# Altium PCB Buck-Boost-Converter_PCB.PcbDoc (part 2 of 2)
Units mm, origin at the board's own origin, x right, y up, seen from the top; angles counter-clockwise.
Board outline 189.74 x 81.03 mm, 4 copper layers (Top Layer, GND Layer, Pwr Layer, Bottom Layer), stack 2.398 mm thick; 93 components, 21 nets, 175 pads, 81 vias.
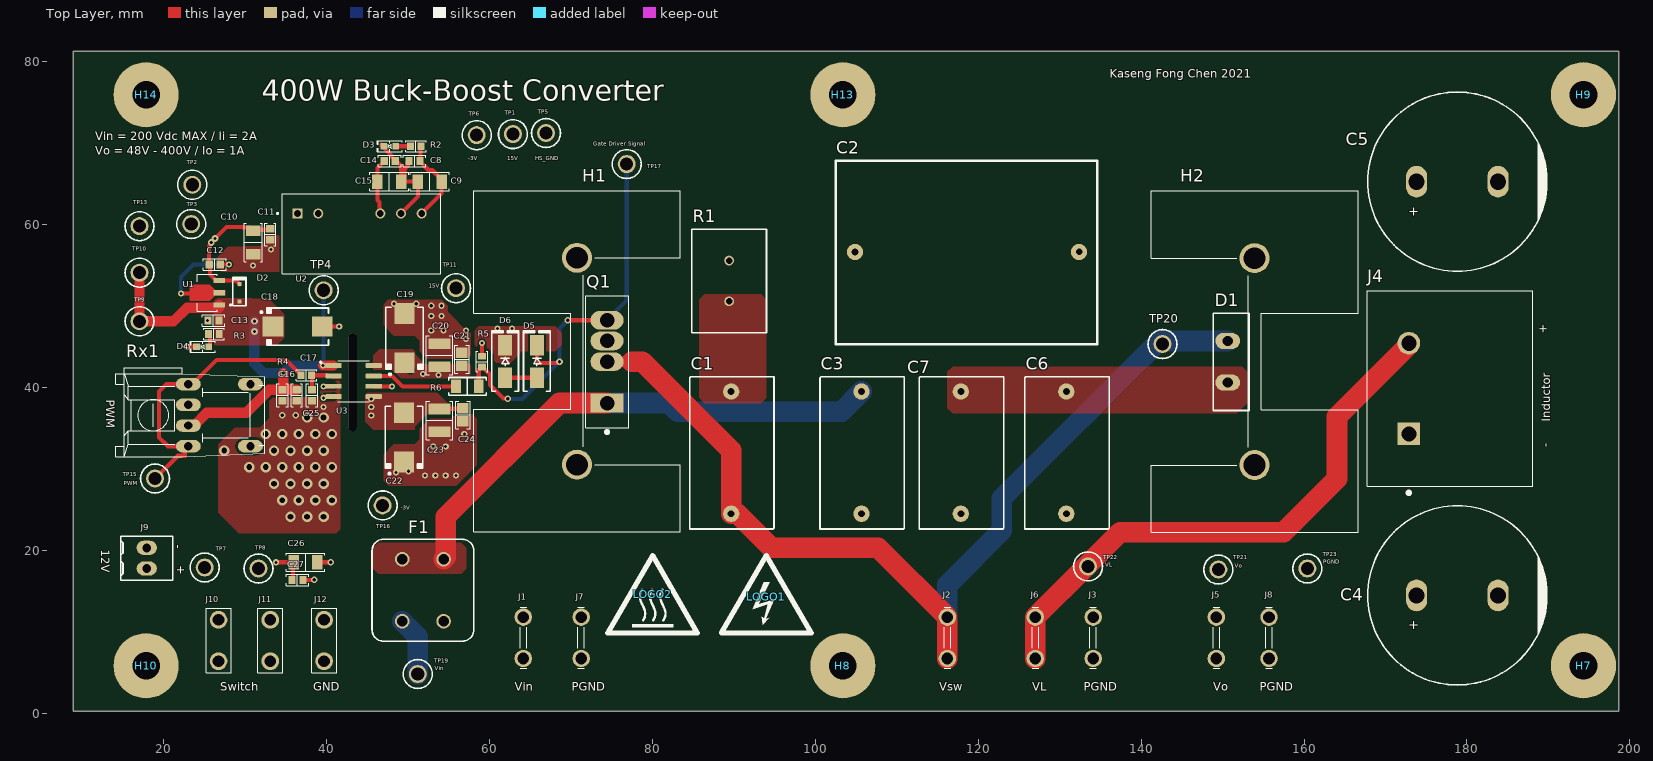
[diagram p0: Top Layer view]

## Part data (continued)
J9: "TE CONNECTIVITY / BUCHANAN - 282834-2 - TERMINAL BLOCK, WIRE TO BRD, 2POS, 16AWG", Color=Green, Current=10A, Flammability Rating="UL94 V-0", Manufacturer="TE Connectivity", Max Operating Temperature=105°C, Max Supply Voltage (AC)=150V, Min Operating Temperature=-40°C, Package Quantity=300, Supplier Part Number 1=A98333-ND, Approvals=UL, Category="Terminal Blocks", Closed End="No (Without)", ComponentLink1Description=https://datasheet.ciiva.com/11758/0900766b80e7dc96-11758675.pdf?src-supplier=RSComponents, ComponentLink1URL=https://datasheet.ciiva.com/11758/0900766b80e7dc96-11758675.pdf?src-supplier=RSComponents, ComponentLink2Description=https://datasheet.ciiva.com/16386/282834-2-16386363.pdf?src-supplier=Future+Electronics, ComponentLink2URL=https://datasheet.ciiva.com/16386/282834-2-16386363.pdf?src-supplier=Future+Electronics, ComponentLink3Description=https://datasheet.ciiva.com/14609/70086732-14609670.pdf?src-supplier=Allied+Electronics, ComponentLink3URL=https://datasheet.ciiva.com/14609/70086732-14609670.pdf?src-supplier=Allied+Electronics, ComponentLink4Description=https://datasheet.ciiva.com/15169/getdatasheetpartid-155864-15169558.pdf?src-supplier=Verical, ComponentLink4URL=https://datasheet.ciiva.com/15169/getdatasheetpartid-155864-15169558.pdf?src-supplier=Verical, ComponentLink5Description=https://datasheet.ciiva.com/16676/eng-cs-1308389-eurostyle-terminal-blocks-0607-16676126.pdf?src-supplier=Avnet+Europe, ComponentLink5URL=https://datasheet.ciiva.com/16676/eng-cs-1308389-eurostyle-terminal-blocks-0607-16676126.pdf?src-supplier=Avnet+Europe, ComponentLink6Description=https://datasheet.ciiva.com/30166/eng-cs-1308389-eurostyle-terminal-blocks-0607-30166974.pdf?src-supplier=Onlinecomponents.com, ComponentLink6URL=https://datasheet.ciiva.com/30166/eng-cs-1308389-eurostyle-terminal-blocks-0607-30166974.pdf?src-supplier=Onlinecomponents.com, ComponentLink7Description=https://datasheet.ciiva.com/3141/eng-cs-1308389-eurostyle-terminal-blocks-0607-3141115.pdf?src-supplier=Avnet, ComponentLink7URL=https://datasheet.ciiva.com/3141/eng-cs-1308389-eurostyle-terminal-blocks-0607-3141115.pdf?src-supplier=Avnet, ComponentLink8Description=https://datasheet.ciiva.com/823/eng-cd-282834-c1-823453.pdf?src-supplier=Digi-Key, ComponentLink8URL=https://datasheet.ciiva.com/823/eng-cd-282834-c1-823453.pdf?src-supplier=Digi-Key, Connector Type=Receptacle, Contact Material=Brass, Contact Plating=Tin, Current Rating=10A, Depth=6.5mm, ELV=Compliant, Gender=Male, Housing Color=Green, Housing Material=Polyamide, Interlock="No (Without)", Lead Free="Lead Free", Length=5.54mm, Manufacturer Part Number=282834-2, Material=Nylon, Max Current Rating=10A, Max Voltage Rating (AC)=150V, Mount="Through Hole", Number of Circuits=2, Number of Contacts=2, Number of Levels=1, Number of Poles=2, Number of Positions=2, Number of Positions Per Level=2, Number of Rows=1, Orientation=Straight, Packaging=Bulk, Pitch=2.54mm, Plating=Brass,Steel, Pricing 1="1=1,27000, 10=0,89500, 25=0,83440, 50=0,75740, 100=0,75410, 250=0,63676, 500=0,60324, 1000=0,53622, 5000=0,50270 (USD)", Radiation Hardening=No, REACH SVHC=Unknown, RoHS=Yes, RoHS Compliant=Yes, Screw Flange="No (Without)", Screwless Terminal Block="Yes (With)", Series=Buchanan, Side Stackable="Yes (With)", Stock 1=21575, Supplier 1=Digi-Key, Tail Length=3.4mm, Termination=Solder, Thread Size=M1.6, Voltage=150V, Voltage Rating=150V, Width=6.5mm, Wire Gauge (Max)=30AWG, Wire Gauge (Min)=30AWG, Wire/Cable Gauge=30AWG
J10 J11 J12: library part 1217133-1, "FASTON 187 PCB TAB TPBR", Package=None, Availability=Good, Check_prices=https://www.snapeda.com/parts/1217133-1/TE%20Connectivity%20AMP%20Connectors/view-part/660570/?ref=eda, EU_RoHS_Compliance=Compliant, MF="TE Connectivity", MP=1217133-1, Price=None, Purchase-URL=https://pricing.snapeda.com/search/part/1217133-1/?ref=eda, SnapEDA_Link=https://www.snapeda.com/parts/1217133-1/TE%20Connectivity%20AMP%20Connectors/view-part/660570/?ref=snap
LOGO1: library part CMP-0074835-1, "IEC 61010-1 High Voltage Warning", LatestRevisionDate=2017-07-06, Lib Reference=IEC_HighVoltage, PartNumber="DANGER HIGH VOLTAGE", Published=2009-03-03, Publisher="Texas Instruments", SymbolCreator=a0412235, SymbolVersion=2011-08-22
LOGO2: library part CMP-0074837-1, "IEC 61010-1 Hot Surface Warning", LatestRevisionDate=2017-07-06, Lib Reference=IEC_HotSurface, PartNumber="CAUTION HOT SURFACE", Published=2009-03-03, Publisher="Texas Instruments", SymbolCreator=a0412235, SymbolVersion=2011-08-22
Q1: "Sic MOSFET 650V", Manufacturer="Cree Wolfspeed", Supplier Part Number 1=1697-C3M0045065K-ND, Manufacturer Part Number=C3M0045065K, Pricing 1="1=10,55000 (USD)", RoHS=No, Stock 1=444, Supplier 1=Digi-Key
R1: library part SQMW747RJ, "Wirewound Resistors 47 Ohms 7W 300PPM", Case/Package=Radial, Manufacturer="TE Connectivity", Max Operating Temperature=250°C, Max Power Dissipation=7W, Min Operating Temperature=-55°C, Number of Resistors=1, Package Quantity=250, Resistance=47R, Resistance Tolerance=5%, Resistor Type="Wirewound,Power resistor", Supplier Part Number 1=A102485-ND, Temperature Coefficient=300ppm/°C, Voltage Rating=500V, Category="Through-Hole Resistors", ComponentLink1Description=https://datasheet.ciiva.com/16761/70063865-16761751.pdf?src-supplier=Allied+Electronics, ComponentLink1URL=https://datasheet.ciiva.com/16761/70063865-16761751.pdf?src-supplier=Allied+Electronics, ComponentLink2Description=https://datasheet.ciiva.com/7716/1468561-7716282.pdf?src-supplier=Element14, ComponentLink2URL=https://datasheet.ciiva.com/7716/1468561-7716282.pdf?src-supplier=Element14, Depth=9mm, ELV=Compliant, Features="Moisture Resistant", Height=9mm, Lead Length=3.5mm, Lead Pitch=5mm, Length=39mm, Manufacturer Part Number=SQMW747RJ, Mount=Radial, Number of Terminations=2, Packaging="Loose Piece", Power Rating=7W, Pricing 1="1=0,69000, 10=0,57500, 25=0,49240, 50=0,44320, 100=0,38580, 250=0,34472, 500=0,27908, 1000=0,22572, 5000=0,21833 (USD)", REACH SVHC="No SVHC", RoHS=Yes, RoHS Compliant=Yes, Series="SQ, CGS", Stock 1=6233, Supplier 1=Digi-Key, Technology="WIRE WOUND", Termination=Radial, Tolerance=5%, Width=13mm
R2 R3: library part RC0603FR-0710KL, "RES SMD 10K OHM 1% 1/10W 0603", Device Package="0603 (1608 Metric)", Manufacturer=Yageo, Operating Temperature="-55°C ~ 155°C", Power (Watts)="0.1W, 1/10W", Supplier Device Package=0603, Supplier Part Number 1=311-10.0KHRCT-ND, Temperature Coefficient=±100ppm/°C, Tolerance=±1%, ComponentLink1Description=Datasheet, ComponentLink1URL=https://www.yageo.com/upload/media/product/productsearch/datasheet/rchip/PYu-RC_Group_51_RoHS_L_10.pdf, ComponentLink2Description="DigiKey Link", ComponentLink2URL=http://digikey.com/product-detail/en/yageo/RC0603FR-0710KL/311-10.0KHRCT-ND/729827, Composition="Thick Film", Features="Moisture Resistant", Height - Seated (Max)="0.022\" (0.55mm)", LastUpdated="2/9/2020 01:09:45", Lifecycle Status=Active, Minimum Order=1, Number of Terminations=2, Package / Case="0603 (1608 Metric)", Packaging=CutTape, Part Number=RC0603FR-0710KL, Part Status=Active, PartId=22599, Price=0.10, Resistance="10 kOhms", Series=RC, Size / Dimension="0.063\" L x 0.031\" W (1.60mm x 0.80mm)", Supplier 1=DigiKey
R4: library part CRCW0603100RFKEAC, "RES SMD 100 OHM 1% 1/10W 0603", Device Package="0603 (1608 Metric)", Manufacturer="Vishay Dale", Operating Temperature="-55°C ~ 155°C", Power (Watts)="0.1W, 1/10W", Supplier Device Package=0603, Supplier Part Number 1=541-3951-1-ND, Temperature Coefficient=±100ppm/°C, Tolerance=±1%, ComponentLink1Description=Datasheet, ComponentLink1URL=http://www.vishay.com/docs/28773/crcwce3.pdf, ComponentLink2Description="DigiKey Link", ComponentLink2URL=http://digikey.com/product-detail/en/vishay-dale/CRCW0603100RFKEAC/541-3951-1-ND/7928634, Composition="Thick Film", Height - Seated (Max)="0.022\" (0.55mm)", LastUpdated="2/9/2020 01:10:09", Lifecycle Status=Active, Minimum Order=1, Number of Terminations=2, Package / Case="0603 (1608 Metric)", Packaging=CutTape, Part Number=CRCW0603100RFKEAC, Part Status=Active, PartId=12546, Price=0.10, Resistance="100 Ohms", Series=CRCW-C, Supplier 1=DigiKey
R5: library part CRCW12062R70FKEAHP, "RES SMD 2.7 OHM 1% 3/4W 1206", Device Package="1206 (3216 Metric)", Manufacturer="Vishay Dale", Operating Temperature="-55°C ~ 155°C", Power (Watts)="0.75W, 3/4W", Ratings=AEC-Q200, Supplier Device Package=1206, Supplier Part Number 1=541-2.70UCT-ND, Temperature Coefficient=±100ppm/°C, Tolerance=±1%, ComponentLink1Description=Datasheet, ComponentLink1URL=http://www.vishay.com/docs/20043/crcwhpe3.pdf, ComponentLink2Description="DigiKey Link", ComponentLink2URL=http://digikey.com/product-detail/en/vishay-dale/CRCW12062R70FKEAHP/541-2.70UCT-ND/5326978, Composition="Thick Film", Features="Automotive AEC-Q200, Pulse Withstanding", Height - Seated (Max)="0.024\" (0.60mm)", LastUpdated="2/9/2020 01:12:48", Lifecycle Status=Active, Minimum Order=1, Number of Terminations=2, Package / Case="1206 (3216 Metric)", Packaging=TapeAndReel, Part Number=CRCW12062R70FKEAHP, Part Status=Active, PartId=36112, Price=0.06, Resistance="2.7 Ohms", Series=CRCW-HP, Size / Dimension="0.122\" L x 0.063\" W (3.10mm x 1.60mm)", Supplier 1=DigiKey
R6: library part RC0603FR-0720KL, "RES SMD 20K OHM 1% 1/10W 0603", Device Package="0603 (1608 Metric)", Manufacturer=Yageo, Operating Temperature="-55°C ~ 155°C", Power (Watts)="0.1W, 1/10W", Supplier Device Package=0603, Supplier Part Number 1=311-20.0KHRCT-ND, Temperature Coefficient=±100ppm/°C, Tolerance=±1%, ComponentLink1Description=Datasheet, ComponentLink1URL=https://www.yageo.com/upload/media/product/productsearch/datasheet/rchip/PYu-RC_Group_51_RoHS_L_10.pdf, ComponentLink2Description="DigiKey Link", ComponentLink2URL=http://digikey.com/product-detail/en/yageo/RC0603FR-0720KL/311-20.0KHRCT-ND/729987, Composition="Thick Film", Features="Moisture Resistant", Height - Seated (Max)="0.022\" (0.55mm)", LastUpdated="2/9/2020 01:09:40", Lifecycle Status=Active, Minimum Order=1, Number of Terminations=2, Package / Case="0603 (1608 Metric)", Packaging=CutTape, Part Number=RC0603FR-0720KL, Part Status=Active, PartId=23954, Price=0.10, Resistance="20 kOhms", Series=RC, Size / Dimension="0.063\" L x 0.031\" W (1.60mm x 0.80mm)", Supplier 1=DigiKey
Rx1: "RX Optical Fiber 5MBd 6-Pin", Manufacturer="Broadcom Avago", Max Operating Temperature=85°C, Max Output Current=25mA, Max Power Dissipation=40mW, Max Supply Voltage=7V, Min Operating Temperature=-40°C, Min Supply Voltage=-500mV, Operating Supply Current=10mA, Operating Supply Voltage=5V, Package Quantity=200, Supplier Part Number 1=516-2067-ND, Category="Fiber Optics", Data Rate=115Kbps, Fall Time=40ns, Height=18.8mm, Lead Free="Lead Free", Length=18.3mm, Manufacturer Part Number=HFBR-2531Z, Mount="Through Hole", Number of Pins=6, Output Current=25mA, Packaging=Rail/Tube, Pricing 1="1=12,98000, 10=9,79400, 100=8,22730, 500=7,55568, 1000=7,39200 (USD)", Radiation Hardening=No, REACH SVHC="No SVHC", Rise Time=80ns, RoHS=Yes, RoHS Compliant=Yes, Series=HFBR-2, Stock 1=6696, Supplier 1=Digi-Key, Wavelength=660nm, Weight=0.021164oz, Width=12.2mm
TP1 TP2 TP3 TP4 TP6 TP7 TP8 TP9 TP10 TP11 TP15 TP16 TP17 TP19 TP20 TP21: "Test Point, Multipurpose, Red, TH", Color=Red, Manufacturer=Keystone, Supplier Part Number 1=36-5010-ND, ComponentLink1Description="Datasheet URL", ComponentLink1URL=http://www.keyelco.com/userAssets/file/M60-2p60.pdf, CompType="Test Point Loop", ContactFinish=Silver, LatestRevisionDate=2016-02-11, MountType=TH, PackageReference="Red Multipurpose Testpoint", PartNumber=5010, Publisher="Texas Instruments", RoHS=Y, Supplier 1=Digi-Key, Supplier 2=Mouser, Supplier Part Number 2=534-5010, SymbolVersion=2008-04-04
TP5 TP13 TP22 TP23: "Test Point, Multipurpose, Black, TH", Color=Black, Manufacturer=Keystone, Supplier Part Number 1=36-5011-ND, ComponentLink1Description="Datasheet URL", ComponentLink1URL=http://www.keyelco.com/userAssets/file/M60-2p60.pdf, CompType="Test Point Loop", ContactFinish=Silver, LatestRevisionDate=2016-02-11, MountType=TH, PackageReference="Black Multipurpose Testpoint", PartNumber=5011, Publisher="Texas Instruments", RoHS=Y, Supplier 1=Digi-Key, Supplier 2=Mouser, Supplier Part Number 2=534-5011, SymbolVersion=2008-04-04
U1: "Voltage regulator; linear, fixed; 5V; 0.1A; SOT89; SMD; 0÷125°C", Case/Package=SOT-89, Dropout Voltage=1.7V, Manufacturer=STMicroelectronics, Max Input Voltage=30V, Max Operating Temperature=125°C, Max Output Current=100mA, Min Input Voltage=7V, Min Operating Temperature=0°C, Min Output Voltage=5V, Output Voltage Accuracy=4%, Package Quantity=1, Power Supply Rejection Ratio (PSRR)=49dB, Quiescent Current=6mA, Supplier Part Number 1=497-1183-1-ND, Accuracy=4%, Category="Voltage Regulators - Linear", ComponentLink1Description=https://datasheet.ciiva.com/2041/cd00000446-2041792.pdf?src-supplier=Digi-Key, ComponentLink1URL=https://datasheet.ciiva.com/2041/cd00000446-2041792.pdf?src-supplier=Digi-Key, ComponentLink2Description=https://datasheet.ciiva.com/1511/1868798-1511940.pdf?src-supplier=Element14, ComponentLink2URL=https://datasheet.ciiva.com/1511/1868798-1511940.pdf?src-supplier=Element14, ComponentLink3Description=https://datasheet.ciiva.com/7992/1868798-7992600.pdf?src-supplier=Element14, ComponentLink3URL=https://datasheet.ciiva.com/7992/1868798-7992600.pdf?src-supplier=Element14, ComponentLink4Description=https://datasheet.ciiva.com/16393/cd00000446-16393708.pdf?src-supplier=Future+Electronics, ComponentLink4URL=https://datasheet.ciiva.com/16393/cd00000446-16393708.pdf?src-supplier=Future+Electronics, ComponentLink5Description=https://datasheet.ciiva.com/22710/1868798-22710940.pdf?src-supplier=Element14, ComponentLink5URL=https://datasheet.ciiva.com/22710/1868798-22710940.pdf?src-supplier=Element14, ComponentLink6Description=https://datasheet.ciiva.com/4882/cd00000446-355303-4882429.pdf?src-supplier=Mouser, ComponentLink6URL=https://datasheet.ciiva.com/4882/cd00000446-355303-4882429.pdf?src-supplier=Mouser, ComponentLink7Description=https://datasheet.ciiva.com/2041/cd00000446-2041790.pdf?src-supplier=Digi-Key, ComponentLink7URL=https://datasheet.ciiva.com/2041/cd00000446-2041790.pdf?src-supplier=Digi-Key, ComponentLink8Description=https://datasheet.ciiva.com/2041/cd00000446-2041791.pdf?src-supplier=Digi-Key, ComponentLink8URL=https://datasheet.ciiva.com/2041/cd00000446-2041791.pdf?src-supplier=Digi-Key, Contact Plating=Tin,Matte, Height=1.6mm, Lead Free="Lead Free", Length=4.6mm, Manufacturer Part Number=L78L05ACUTR, Mount="Surface Mount", Nominal Output Voltage=5V, Number of Outputs=1, Number of Pins=3, Number of Regulators=1, Output Current=100mA, Output Type=Fixed, Output Voltage=5V, Packaging="Tape and Reel", Polarity=Positive, Pricing 1="1=0,53000, 10=0,43300, 25=0,39600, 100=0,26710, 250=0,22108, 500=0,20266, 1000=0,17380 (USD)", Radiation Hardening=No, REACH SVHC="No SVHC", RoHS=Yes, RoHS Compliant=Yes, Series=-, Stock 1=40018, Supplier 1=Digi-Key, Weight=0.004603oz, Width=2.6mm
U2: "2W DC/DC-Converter 'ECONOLINE' SIP7 6.4kV unreg; V. In: 15; V. Out: +15/-03; mA. Out: +93/-185", Manufacturer=Recom, Max Output Voltage=15V, Supplier Part Number 1=945-3070-5-ND, Category="Voltage Regulators - Switching", ComponentLink1Description=https://www.recom-power.com/pdf/Econoline/RxxP2xxyy.pdf?src-supplier=Digi-Key, ComponentLink1URL=https://www.recom-power.com/pdf/Econoline/RxxP2xxyy.pdf?src-supplier=Digi-Key, Height=12.5mm, Length=19.5mm, Manufacturer Part Number=R15P21503D, Pricing 1="1=8,47000, 5=8,31800, 10=8,25500, 25=8,12800, 50=7,87400, 100=7,26000, 250=6,98500, 500=6,85800 (USD)", RoHS=Yes, RoHS Compliant=Yes, Stock 1=1614, Supplier 1=Digi-Key, Weight=4.3g, Width=9.8mm
U3: "10-A/10-A, 3-k/5-kVRMS single-channel isolated gate driver with 12-V UVLO, bipolar supply 8-SOIC -40 to 125", Case/Package=SOIC, High Level Output Current=10A, Manufacturer="Texas Instruments", Max Operating Temperature=125°C, Min Operating Temperature=-40°C, Supplier Part Number 1=296-48101-ND, Working Voltage=990V, Approvals=CSA,VDE,UR,CQC, Category="Integrated Circuits (ICs)", ComponentLink1Description=http://www.ti.com/lit/ds/symlink/ucc5390.pdf?src-supplier=Digi-Key, ComponentLink1URL=http://www.ti.com/lit/ds/symlink/ucc5390.pdf?src-supplier=Digi-Key, Low Level Output Current=10A, Manufacturer Part Number=UCC5390ECD, Mount="Surface Mount", Number of Channels=1, Packaging=Rail/Tube, Pricing 1="1=2,81000, 10=2,52800, 25=2,38480, 100=1,90800, 250=1,66952, 500=1,62180, 1000=1,28790, 2500=1,26000 (USD)", Propagation Delay=100ns, Pulse Width Distortion (PWD)=20ns, RoHS=Yes, RoHS Compliant=Yes, Stock 1=1559, Supplier 1=Digi-Key

## Free pads (board coordinates)
  oval 1x12 hole 1 slot 12 at 90 deg unplated mask+0.127: 0(43.18,40.64)
  round 8 hole 3.4: 1(17.831,5.842) 1(17.831,75.946) 1(103.378,5.842) 1(103.378,75.946) 1(194.31,5.842) 1(194.31,75.946)

## Via types
v1: diameter 0.762, hole 0.381, Top Layer to Bottom Layer, 42 vias
v2: diameter 1.27, hole 0.711, Top Layer to Bottom Layer, 29 vias
v3: diameter 0.813, hole 0.406, Top Layer to Bottom Layer, 10 vias

## Nets (pads, with @x,y where several pads share a name; then routed paths per layer and width w, separated by ;. In a path a pad name is that pad's centre, name@x,y a point inside that pad or via, vN(x,y) a via of type N, cw(c..) or ccw(c..) an arc to the next point about the centre after c; other vN are vias at no path point)
+5V: C13.2 C16.2 C17.2 C18.1 D2.2 R3.1 Rx1.3 TP4.1 TP9.1 TP10.1 U1.1 U3.1 | length 59.1
  Top Layer w1.27: TP10.1 TP9.1 21.188,48.133 22.858,49.803 26.759,49.803 26.824,49.868 U1.1 ; Rx1.3 23.706,35.331 25.273,36.899 25.273,36.906 30.148,36.906 32.956,39.715 C16.2 ; v3(34.671,41.783) 34.671,39.816 C16.2 ; C17.2 36.311,39.715 C16.2 ; v1(39.548,42.697) U3.1
  Bottom Layer w0.508: v1@39.624,42.774 TP4.1
  Bottom Layer w1.27: v3(31.131,48.149) v3(31.131,46.879) 31.115,46.863 31.115,42.949 32.281,41.783 v3(34.671,41.783) 35.585,42.697 v1(39.548,42.697) v1@39.624,42.774
+12V: C10.2 C11.2 C12.2 C26.2 C27.2 D2.1 J11.1 TP2.1 TP3.1 TP8.1 U1.3 U2.1 | length 21
  Top Layer w0.508: C12.2@25.491,55.19 C12.2@25.505,55.204 ; D2.1 28.836,53.138 U1.3 26.409,53.138 25.691,53.856 25.691,54.99 C12.2 25.563,57.364 25.781,57.582 25.781,57.785 v3(25.806,57.81) 27.686,59.69 29.693,59.69 29.728,59.654 30.592,59.654 C10.2 31.097,59.367 32.962,59.367 C11.2 C11.2@33.121,59.476 ; v1(33.782,18.542) C26.2 35.848,18.428 35.848,16.497 C27.2
  other v3: 26.289,58.293
+15V: C8.2 C9.2 C19.1 C20.1 C21.1 R2.1 TP1.1 TP11.1 U2.7 U3.8 | length 65.4
  Top Layer w0.508: C19.1 49.924,42.682 49.924,42.532 C19.1@50.292,42.164 ; R2.1 51.531,69.55 51.531,68.039 51.438,67.945 51.435,67.945 51.46,67.92 C8.2 51.46,67.743 52.528,66.675 52.955,66.675 54.102,65.528 C9.2 54.102,63.817 U2.7
  Pwr Layer w1.27: TP11.1 55.88,43.688 v1(53.721,41.529) 53.594,41.656 50.8,41.656 49.784,42.672 49.784,52.324 51.662,54.202 U2.7 51.662,64.743 53.594,66.675 59.817,66.675 62.357,69.215 62.357,70.358 62.865,70.866 TP1.1
  other v1: 51.816,41.656
-3V: C14.1 C15.1 C22.2 C23.2 C24.2 TP6.1 TP16.1 U2.5 U3.5 | length 66.3
  Top Layer w0.508: U2.5 46.466,61.494 46.466,62.754 46.228,62.992 C15.1 46.228,66.94 46.835,67.547 46.866,67.547 47.062,67.743 C14.1 ; C23.2 53.911,37.401 56.68,37.401 C24.2
  Pwr Layer w1.27: TP16.1 46.863,28.575 45.466,29.972 v1(45.466,36.576) 45.212,36.83 45.212,53.086 46.582,54.456 U2.5 46.582,67.41 50.165,70.993 TP6.1
  other v1: 45.466,37.592 45.466,38.608
GND: C10.1 C11.1 C12.1 C13.1 C16.1 C17.1 C18.2 C25.1 C26.1 C27.1 D4.2 J9.2 J12.1 Rx1.2 TP13.1 U1.2 U2.2 U3.3 U3.4 | length 23.2
  Top Layer w0.508: v1(22.098,51.562) 24.294,51.562 24.37,51.638 U1.2 ; v1(22.86,45.009) D4.2 ; v1(25.356,48.235) C13.1@25.418,48.235 ; C12.1@26.911,55.12 C12.1 v1(27.991,55.118) ; C27.1 v3(38.481,16.383) ; C26.1 v3(40.513,18.542) ; C18.2 39.474,47.498 v1(41.529,47.498) ; v1(39.624,38.735) 39.693,38.735 39.799,38.841 40.791,38.841 U3.4 ; v1(39.624,40.132) 39.637,40.145 40.106,40.145 40.119,40.157 U3.3
  Bottom Layer w0.508: v1(22.098,51.562) 22.098,53.594 23.622,55.118 v1(27.991,55.118)
  other v1: 34.544,36.601 36.195,36.601 39.624,37.592 30.963,54.966 33.172,56.947
  other v2: 35.56,24.13 37.592,24.13 39.624,24.13 34.544,26.162 36.576,26.162 38.608,26.162 40.64,26.162 33.528,28.194 35.56,28.194 37.592,28.194 39.624,28.194 30.48,30.226 32.512,30.226 34.544,30.226 36.576,30.226 38.608,30.226 40.64,30.226 27.432,32.258 33.528,32.258 35.56,32.258 37.592,32.258 39.624,32.258 32.512,34.29 34.544,34.29 36.576,34.29 38.608,34.29 40.64,34.29 37.592,36.322 39.624,36.322
HS_GND: C8.1 C9.1 C14.2 C15.2 C19.2 C20.2 C21.2 C22.1 C23.1 C24.1 D3.2 D6.2 Q1.3 R6.1 TP5.1 U2.6 U3.6 | length 19.9
  Top Layer w0.508: U3.6 46.462,40.157 46.475,40.145 47.993,40.145 v1(48.006,40.132) ; D3.2 46.761,69.85 46.736,69.85 46.736,69.711 47.966,68.481 47.966,68.289 48.412,67.843 C14.2 48.412,67.76 48.608,67.564 48.83,67.564 49.128,67.266 C15.2 ; U2.6 51.202,63.457 C9.1 C15.2 ; C8.1 49.944,67.626 49.944,67.218 49.524,66.798 49.524,65.674 C15.2 ; R6.1@58.884,44.016 R6.1 v1(59.055,45.466)
  other v1: 52.07,29.21 53.34,29.21 54.61,29.21 55.88,29.21 48.514,29.591 50.038,29.718 53.086,32.766 54.61,32.766 56.896,34.29 57.096,45.974 52.832,46.99 54.356,46.99 57.096,46.99 60.96,47.244 62.738,47.244 52.832,48.768 54.102,48.768 52.832,50.038 54.102,50.038 48.26,50.292 51,50.292
NetC1_1: C1.1 R1.2
NetC1_2: C1.2 D1.1 J2.1 Q1.2 TP20.1 | length 117.5
  Top Layer w1.27: Q1.2 77.47,43.18
  Top Layer w2.54: 77.47,43.18 78.74,43.18 89.662,32.258 C1.2 90.431,24.504 94.615,20.32 107.696,20.32 116.205,11.811 J2.1@116.205,6.731
  Bottom Layer w1.27: Q1.2@74.422,43.154 Q1.2
  Bottom Layer w2.54: J2.1@116.205,11.811 116.205,15.764 122.882,22.44 122.882,26.393 142.208,45.72 D1.1
NetC2_1: C2.1 C3.1 F1.3 F1.4 Q1.1 R1.1 | length 63.6
  Top Layer w2.54: F1.4 54.61,19.177 54.61,24.13 68.58,38.1 Q1.1
  Bottom Layer w2.54: Q1.1 82.021,38.1 83.087,37.034 103.194,37.034 C3.1
NetC4_1: C4.1 C5.1 C6.1 C7.1 D1.2 J5.1 TP21.1
NetC25_2: C25.2 R4.2 U3.2 | length 4.5
  Top Layer w0.508: C25.2 38.179,39.763 38.179,41.48 R4.2 U3.2@40.107,41.504 ; U3.2 40.751,41.381 U3.2@41.381,41.373
NetD3_1: D3.1 R2.2 | length 1.8
  Top Layer w0.508: D3.1 R2.2
NetD4_1: D4.1 R3.2 | length 1.7
  Top Layer w0.508: R3.2@25.512,46.534 R3.2 25.654,46.442 25.654,45.148 D4.1
NetD5_1: D5.1 D6.1 | length 3.9
  Top Layer w0.508: D6.1 D5.1
NetD5_2: D5.2 Q1.4 R5.2 R6.2 TP17.1 | length 51.7
  Top Layer w0.508: R5.2 58.674,42.214 59.005,42.545 59.105,42.545 60.069,41.581 60.069,40.294 61.697,38.666 62.172,38.666 v3(62.23,38.608) ; D5.2 65.811,43.329 66.109,43.031 68.349,43.031 68.498,43.18 v3(68.58,43.18) ; v3(69.596,48.26) Q1.4
  Bottom Layer w0.508: v3(62.23,38.608) 64.008,38.608 v3(68.58,43.18) 68.58,47.244 v3(69.596,48.26) ; Q1.4 76.835,50.673 TP17.1
NetF1_1: F1.1 F1.2 J1.1 TP19.1 | length 7.3
  Bottom Layer w2.54: F1.2 51.181,9.398 TP19.1
NetJ4_2: J4.2 J6.1 TP22.1 | length 69.5
  Top Layer w2.54: J6.1@127,6.731 127,11.811 133.35,18.161 137.414,22.225 157.48,22.225 164.055,28.8 164.055,36.42 172.813,45.178 172.813,45.394 J4.2
NetJ9_1: J9.1 J10.1 TP7.1
NetR4_1: R4.1 Rx1.1 Rx1.4 TP15.1 | length 35.7
  Top Layer w0.508: TP15.1 21.717,31.623 22.606,31.623 22.606,32.385 Rx1.4 20.498,32.791 19.431,33.858 19.431,39.497 20.345,40.411 23.534,40.411 26.496,43.373 34.986,43.373 36.634,41.725 36.684,41.725 36.855,41.554 R4.1
NetR5_1: R5.1 U3.7 | length 10.6
  Top Layer w0.508: U3.7 48.037,41.427 49.332,40.132 R5.1
PGND: C2.2 C3.2 C4.2 C5.2 C6.2 C7.2 J3.1 J4.1 J7.1 J8.1 TP23.1
pads on no net: H1.1 H1.2 H2.1 H2.2 H3.0 H4.0 H5.0 H6.0 H7.0 H8.0 H9.0 H10.0 H11.0 H12.0 H13.0 H14.0 Rx1.5 Rx1.8

## Polygon pours and split planes (outlines as drawn)
HS_GND on GND Layer "HS_GND_L02_P031" (solid, pour order 31): 74.676,80.645 76.962,78.359 76.962,29.21 76.835,29.21 73.66,26.035 46.99,26.035 44.45,28.575 44.45,78.74 46.355,80.645
PGND on GND Layer "PGND_L02_P002" (solid, pour order 2): 69.215,19.939 77.47,28.194 124.841,28.194 128.27,31.623 128.27,70.358 133.985,76.073 184.15,76.073 187.198,73.025 187.071,72.898 187.071,7.62 182.753,3.302 71.628,3.302 69.215,5.715
GND on GND Layer "GND_L02_P023" (solid, pour order 23): 8.89,3.175 11.43,0.635 39.37,0.635 41.91,3.175 41.91,78.74 40.005,80.645 10.795,80.645 8.89,78.74
-3V on Top Layer "-3V_L01_P029" (solid, pour order 29): 53.594,39.37 54.864,38.1 54.864,36.83 54.356,36.322 52.324,36.322 50.8,34.798 45.72,34.798 44.704,35.814 44.704,39.116 44.958,39.37
HS_GND on Top Layer "HS_GND_L01_P024" (solid, pour order 24): 46.99,31.75 48.26,33.02 50.8,33.02 51.435,33.655 51.435,34.925 52.705,36.195 55.245,36.195 55.88,36.83 57.785,36.83 58.42,36.195 58.42,30.48 55.88,27.94 47.625,27.94 46.99,28.575
NetC2_1 on Top Layer "NETC2_1_L01_P037" (solid, pour order 37): 56.515,20.955 57.15,20.32 57.15,17.78 56.515,17.145 46.355,17.145 45.72,17.78 45.72,20.32 46.355,20.955
NetC4_1 on Top Layer "NETC4_1_L01_P035" (solid, pour order 35): 116.84,42.545 152.4,42.545 153.035,41.91 153.035,38.1 151.765,36.83 116.84,36.83 116.205,37.465 116.205,41.91
HS_GND on Top Layer "HS_GND_L01_P026" (solid, pour order 26): 68.834,46.736 68.834,45.212 68.072,44.45 63.754,44.45 63.754,44.196 62.611,43.053 60.833,43.053 60.579,43.307 60.579,44.069 59.817,44.831 58.547,44.831 58.166,45.212 58.166,46.99 58.674,47.498 68.072,47.498
NetC1_1 on Top Layer "NETC1_1_L01_P034" (solid, pour order 34): 93.345,51.435 93.98,50.8 93.98,38.735 93.345,38.1 86.36,38.1 85.725,38.735 85.725,50.8 86.36,51.435
GND on Top Layer "GND_L01_P006" (solid, pour order 6): 41.148,22.098 41.681,22.606 41.681,35.636 41.681,40.716 41.58,40.818 39.726,40.818 39.192,40.284 39.192,39.218 38.786,38.811 33.198,38.811 32.944,38.557 32.944,36.373 33.02,36.297 31.775,35.052 28.702,35.052 26.67,33.02 26.67,24.638 29.21,22.098
+15V on Top Layer "+15V_L01_P030" (solid, pour order 30): 45.72,43.942 46.482,44.704 50.546,44.704 52.07,43.18 57.15,43.18 57.658,42.672 57.658,41.656 57.15,41.148 49.022,41.148 48.006,42.164 45.72,42.164
HS_GND on Top Layer "HS_GND_L01_P025" (solid, pour order 25): 46.99,50.165 46.99,47.625 48.26,46.355 50.8,46.355 51.435,45.72 51.435,44.45 52.451,43.434 57.15,43.434 57.658,43.942 57.658,46.736 57.404,46.736 54.864,49.276 54.864,50.038 54.102,50.8 47.498,50.8
GND on Top Layer "GND_L01_P007" (solid, pour order 7): 29.921,57.328 29.896,57.302 27.838,57.302 26.619,56.083 26.619,54.737 27.127,54.229 34.163,54.229 34.163,58.623 34.061,58.725 32.639,58.725 32.614,58.75 32.283,58.42 32.283,57.785 31.826,57.328
+5V on Top Layer "+5V_L01_P013" (solid, pour order 13): 30.785,50.978 30.836,50.927 32.893,50.927 34.798,49.022 34.798,46.101 33.884,45.187 26.314,45.187 26.06,45.441 26.06,50.495 26.314,50.749 26.568,50.978
NetC4_1 on Bottom Layer "NETC4_1_L04_P038" (solid, pour order 38): 149.86,43.18 166.37,43.18 170.18,46.99 170.18,74.295 171.45,75.565 178.435,75.565 179.705,74.295 179.705,6.985 177.8,5.08 147.32,5.08 145.415,6.985 145.415,41.275 147.32,43.18
NetC2_1 on Bottom Layer "NETC2_1_L04_P032" (solid, pour order 32): 85.09,67.31 88.265,70.485 106.68,70.485 109.22,67.945 109.22,39.37 106.045,36.195 100.965,36.195 99.06,38.1 99.06,50.8 96.52,53.34 87.63,53.34 85.09,55.88
NetF1_1 on Bottom Layer "NETF1_1_L04_P033" (solid, pour order 33): 45.72,12.065 47.625,13.97 66.04,13.97 67.31,12.7 67.31,5.08 65.405,3.175 60.96,3.175 55.88,8.255 47.625,8.255 45.72,10.16
+12V on Pwr Layer "+12V_L03_P039" (solid, pour order 39): 29.718,2.667 31.496,0.889 35.179,0.889 36.957,2.667 36.957,58.674 41.783,63.5 41.783,69.215 39.624,71.374 15.621,71.374 11.938,67.691 11.938,30.861 16.51,26.289 27.178,26.289 29.718,23.749
NetJ9_1 on Pwr Layer "NETJ9_1_L03_P005" (solid, pour order 5): 12.7,2.54 14.351,0.889 27.432,0.889 29.21,2.667 29.21,23.368 27.178,25.4 14.605,25.4 12.7,23.495

## Silkscreen, mask and mechanical layers (free items; w line width, h text height)
Top Overlay:
  text "Kaseng Fong Chen 2021" at 136.144,78.063 h1.02
  text "400W Buck-Boost Converter" at 32.004,75.184 h2.54
  text "Vin = 200 Vdc MAX / Ii = 2A" at 11.557,70.358 h1.02
  text "Gate Driver Signal" at 72.72,69.714 h0.51
  text "Vo = 48V - 400V / Io = 1A" at 11.557,68.58 h1.02
  text "-3V" at 57.353,67.894 h0.51
  text "15V" at 62.179,67.894 h0.51
  text "HS_GND" at 65.608,67.894 h0.51
  text "15V" at 52.527,52.273 h0.51
  text "+" at 189.78,46.609 h1.02 r90
  text "PWM" at 12.954,38.481 h1.02 r270
  text "Inductor" at 190.246,35.814 h1.02 r90
  text "-" at 190.119,32.639 h1.02 r90
  text "PWM" at 15.062,28.016 h0.51
  text "-3V" at 49.098,24.968 h0.51
  text "-" at 21.336,20.701 h1.02 r270
  text "12V" at 12.319,20.066 h1.02 r270
  text "PGND" at 162.382,18.364 h0.51
  text "+" at 21.675,18.161 h1.02 r270
  text "VL" at 135.585,17.983 h0.51
  text "Vo" at 151.46,17.856 h0.51
  text "Vin" at 53.289,5.283 h0.51
  text "Switch" at 26.924,2.794 h1.02
  text "GND" at 38.354,2.794 h1.02
  text "Vin" at 63.119,2.794 h1.02
  text "PGND" at 70.104,2.794 h1.02
  text "Vsw" at 115.189,2.794 h1.02
  text "VL" at 126.619,2.794 h1.02
  text "PGND" at 132.969,2.794 h1.02
  text "Vo" at 148.844,2.794 h1.02
  text "PGND" at 154.559,2.794 h1.02

## Text inside footprints (layer, text, board x,y; h text height)
C4: Top Overlay "+" at 174.116,11.728 h2 r180
C5: Top Overlay "+" at 174.116,62.528 h2 r180
Q1: Mechanical 13 "TAB" at 72.259,42.704 h0.64 r90